# Altium PCB PCB_X_ring.PcbDoc
Units mm, origin at the board's own origin, x right, y up, seen from the top; angles counter-clockwise.
Board outline 60.71 x 60.71 mm, 2 copper layers (Top Layer, Bottom Layer); 29 components, 22 nets, 108 pads, 29 vias.
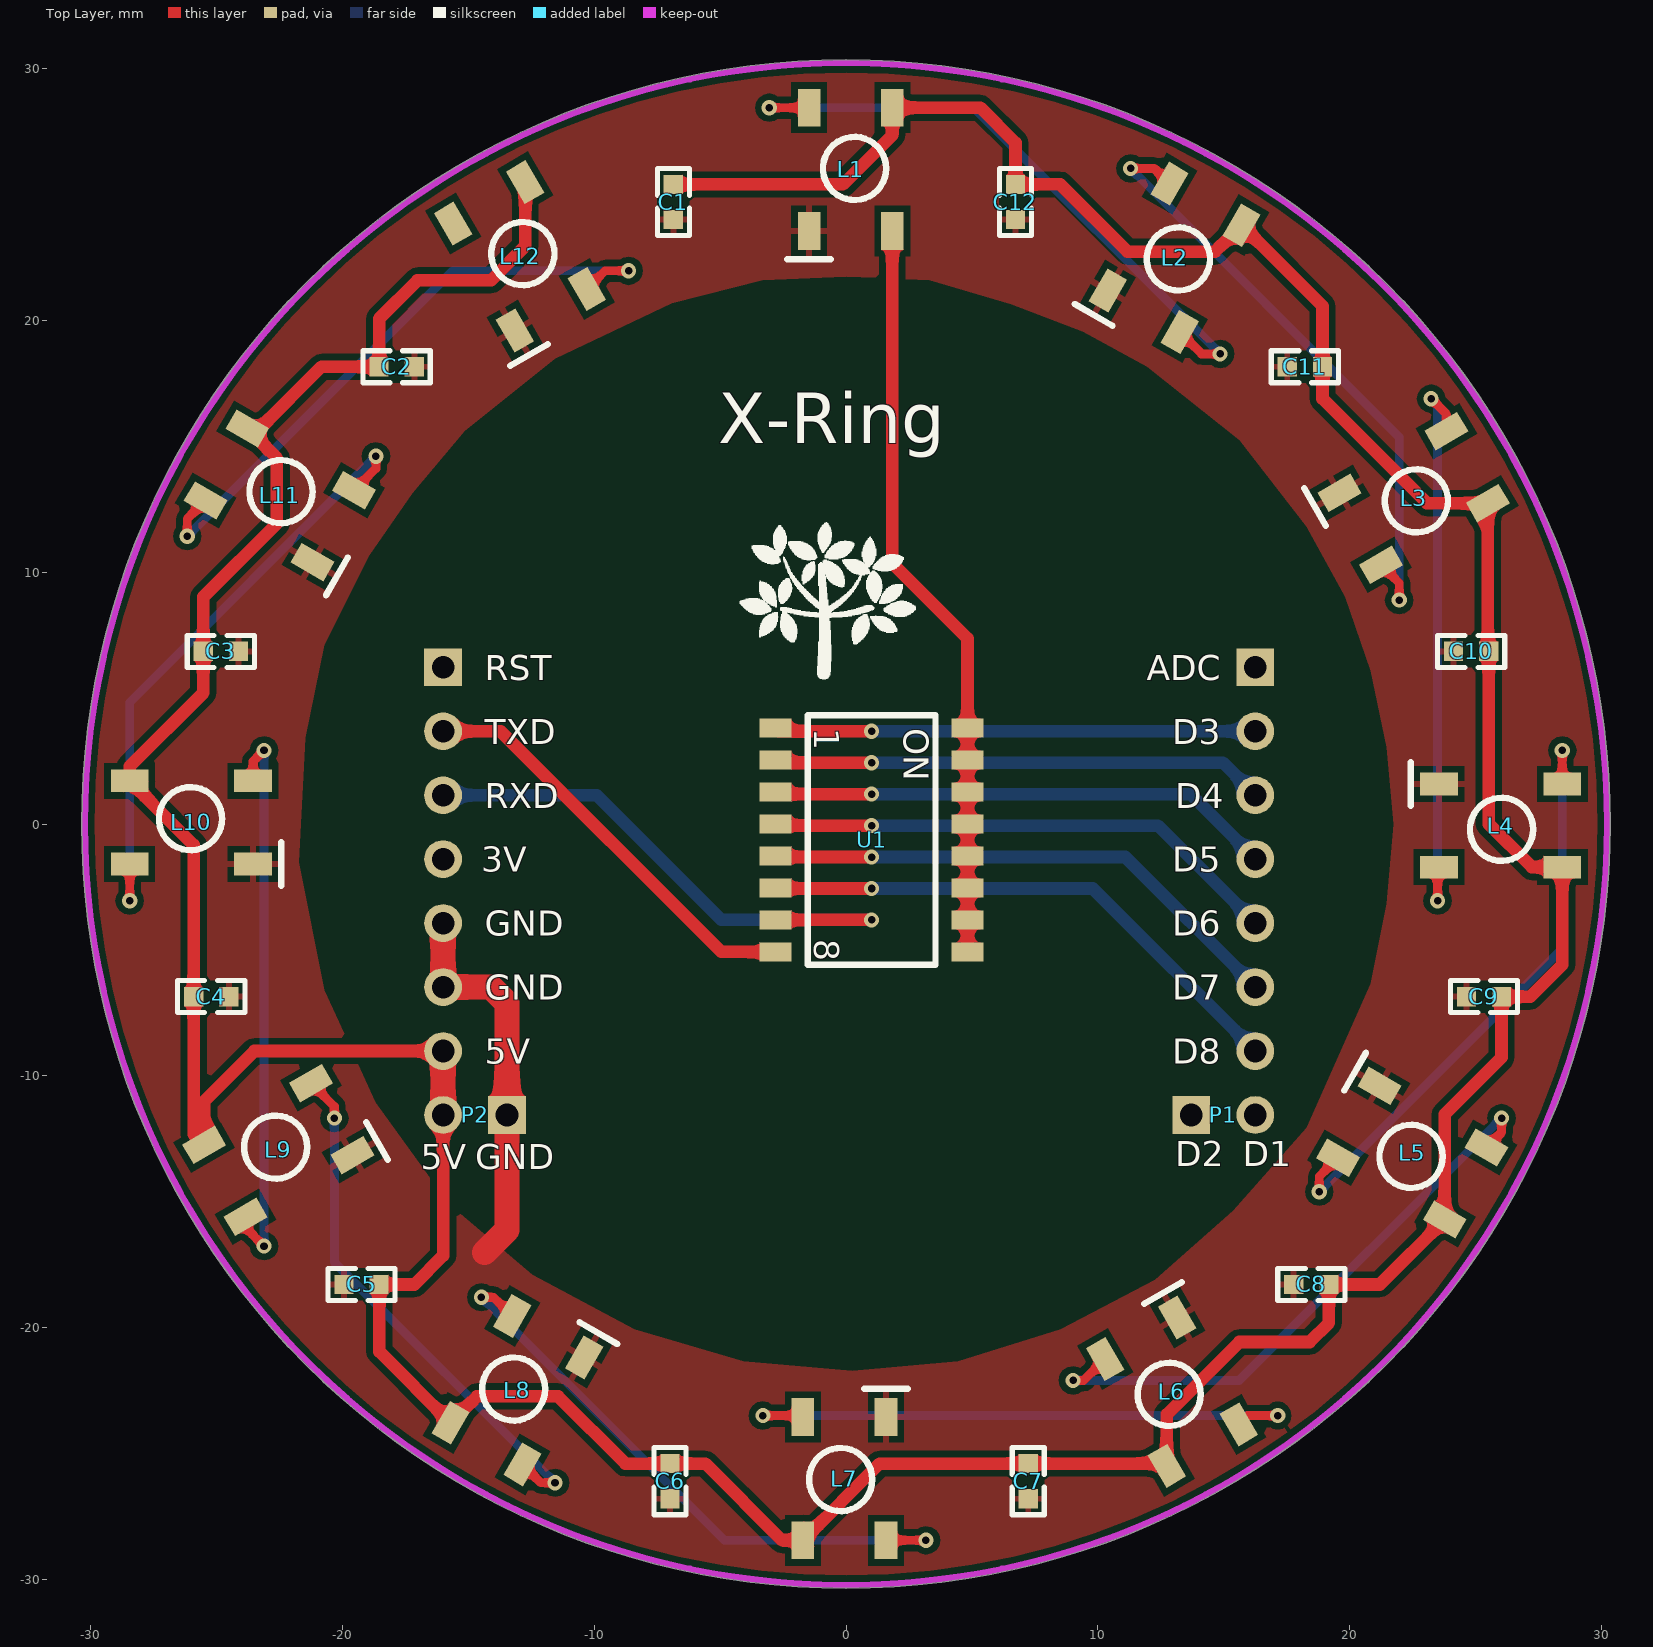
[diagram p0: Top Layer view]
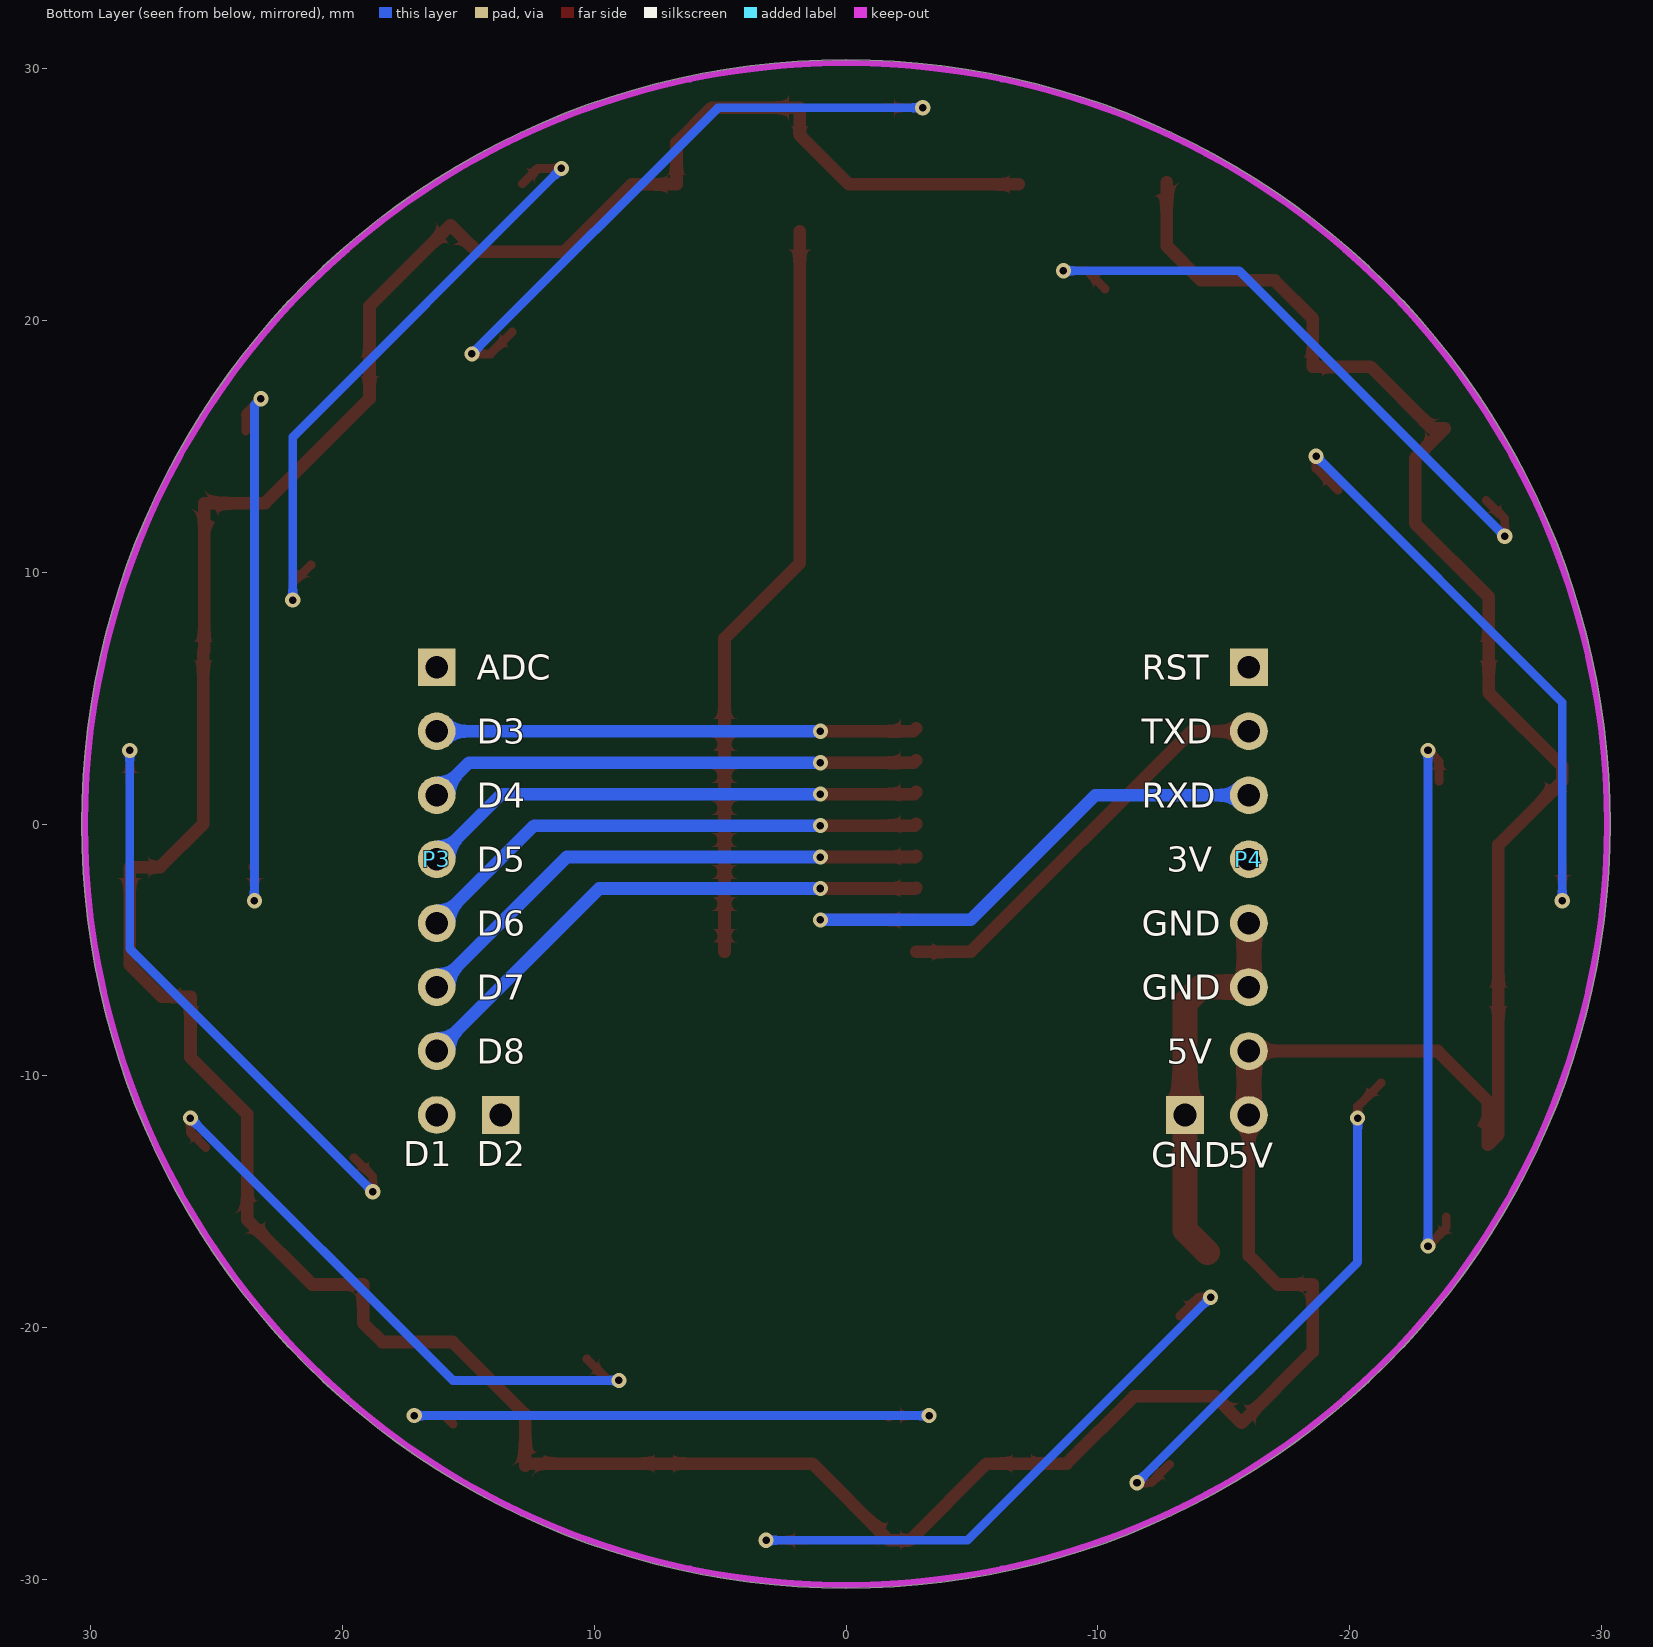
[diagram p1: Bottom Layer view, seen from below]

## Layer stack, top to bottom
Top Solder: solder mask 0.0102, Solder Resist, Dk 3.5
Top Layer: signal copper 0.0356
Dielectric 1: dielectric 0.32, FR-4, Dk 4.8
Bottom Layer: signal copper 0.0356
Bottom Solder: solder mask 0.0102, Solder Resist, Dk 3.5

## Board outline
-30.354,0 ccw(c0,0) 0,-30.354 ccw(c0,0) 30.354,0 ccw(c0,0) 0,30.354 ccw(c0,0)

## Design rules (kind name [scope] priority, off if disabled: settings)
Clearance [All] p1: gap=0.254
PolygonConnect PolygonConnect_via [IsVia] p1: connectstyle=Direct reliefconductorwidth=0.254 reliefentries=4 polygonreliefangle="90 Angle" airgapwidth=0.254
PolygonConnect [All] p2: connectstyle=Relief reliefconductorwidth=0.254 reliefentries=4 polygonreliefangle="90 Angle" airgapwidth=0.254
RoutingVias [All] p1: holewidth=0.711 width=1.27 viastyle="Through Hole" minholewidth=0.711 minwidth=1.27 maxholewidth=0.711 maxwidth=1.27
SolderMaskExpansion [All] p1: expansion=0.102
Width [All] p1: maxlimit=1 minlimit=0.254 preferedwidth=0.254
30 further rules are at their usual default settings.

## Components (designator, comment, footprint, x,y, rotation, side; value= is the part's Value field where it differs from the comment)
C1 "100nF" C0603 -7.036,25.425 r270 top
C2 "100nF" C0603 -18.567,17.983 r0 top
C3 "100nF" C0603 -25.552,6.68 r0 top
C4 "100nF" C0603 -25.933,-7.036 r0 top
C5 "100nF" C0603 -18.517,-18.11 r180 top
C6 "100nF" C0603 -7.163,-25.375 r270 top
C7 "100nF" C0603 7.061,-25.375 r270 top
C8 "100nF" C0603 19.202,-18.11 r180 top
C9 "100nF" C0603 26.06,-6.68 r180 top
C10 "100nF" C0603 25.552,7.036 r180 top
C11 "100nF" C0603 18.948,18.339 r180 top
C12 "100nF" C0603 6.553,25.425 r270 top
L1 "ws2812b" ws2812b 1.838,28.448 r270 top
L2 "ws2812b" ws2812b 15.706,23.781 r240 top
L3 "ws2812b" ws2812b 25.492,12.742 r210 top
L4 "ws2812b" ws2812b 28.448,-1.711 r180 top
L5 "ws2812b" ws2812b 23.781,-15.706 r150 top
L6 "ws2812b" ws2812b 12.742,-25.492 r120 top
L7 "ws2812b" ws2812b -1.711,-28.448 r90 top
L8 "ws2812b" ws2812b -15.706,-23.781 r60 top
L9 "ws2812b" ws2812b -25.492,-12.742 r30 top
L10 "ws2812b" ws2812b -28.448,1.711 r0 top
L11 "ws2812b" ws2812b -23.781,15.706 r330 top
L12 "ws2812b" ws2812b -12.742,25.492 r300 top
P1 "Header 2" HDR1X2 13.716,-11.557 r0 top
P2 "Header 2" HDR1X2 -13.462,-11.557 r180 top
P3 "Header 7" HDR1X7 16.256,6.223 r270 bottom
P4 "Header 7" HDR1X7 -16.002,6.223 r270 bottom
U1 "1.27mmSwitch" NumberSwitch -2.794,3.81 r270 top

## Footprints (in the part's own frame and the unit in brackets; to place one, negate y for a bottom-side part, rotate by r counter-clockwise, add the part's x,y. Pads: shape width x height; smd on the part's side, far side on the other; paste and mask are expansions set on the pad)
C0603 [mil]
  rect 30x30 smd: 1(1,7) 2(56,7)
  silkscreen extent -24,-18 81,32
HDR1X2 [mm] "Connector; Header; 2 Position"
  rect 1.5x1.5 hole 0.9: 1(0,0)
  round 1.5 hole 0.9: 2(2.54,0)
HDR1X7 [mm] "Connector; Header; 7 Position"
  rect 1.5x1.5 hole 0.9: 1(0,0)
  round 1.5 hole 0.9: 2(2.54,0) 3(5.08,0) 4(7.62,0) 5(10.16,0) 6(12.7,0) 7(15.24,0)
NumberSwitch [mm]
  rect 0.76x1.27 smd: 1(0,0) 2(1.27,0) 3(2.54,0) 4(3.81,0) 5(5.08,0) 6(6.35,0) 7(7.62,0) 8(8.89,0) 9(8.89,7.62) 10(7.62,7.62) 11(6.35,7.62) 12(5.08,7.62) 13(3.81,7.62) 14(2.54,7.62) 15(1.27,7.62) 16(0,7.62)
  silkscreen extent -0.51,1.27 9.4,6.35
ws2812b [mm]
  rect 1.5x0.9 smd: 1(0,0) 2(0,-3.3) 3(4.9,-3.3) 4(4.9,0)
  silkscreen extent 1.16,-4.17 6.02,-0.24

## Part data
C1 C2 C3 C4 C5 C6 C7 C8 C9 C10 C11 C12: library part C0603, "贴片电容"
L1 L2 L3 L4 L5 L6 L7 L8 L9 L10 L11 L12: "RGB灯珠"
P1 P2: "Header, 2-Pin"
P3 P4: "Header, 7-Pin"
U1: library part NumberSwitch, "拨码开关"

## Free pads (board coordinates)
  round 3 on Keep-Out: ""(-14.859,10.795) ""(15.113,10.795)

## Via types
v1: diameter 0.6, hole 0.3, Top Layer to Bottom Layer, tented both sides, 29 vias

## Nets (pads, with @x,y where several pads share a name; then routed paths per layer and width w, separated by ;. In a path a pad name is that pad's centre, name@x,y a point inside that pad or via, vN(x,y) a via of type N, cw(c..) or ccw(c..) an arc to the next point about the centre after c; other vN are vias at no path point)
CONNECT: L6.2 L7.4 | length 23.7
  Top Layer w0.35: v1(-3.302,-23.495) -1.764,-23.495 L7.4 ; L6.2 15.947,-23.495 v1(17.145,-23.495)
  Bottom Layer w0.35: v1(-3.302,-23.495) v1(17.145,-23.495)
DIN: L1.4 U1.9 U1.10 U1.11 U1.12 U1.13 U1.14 U1.15 U1.16 | length 29.9
  Top Layer w0.5: L1.4 1.838,10.354 4.826,7.366 U1.16 U1.15 U1.14 U1.13 U1.12 U1.11 U1.10 U1.9
GND: C1.2 C2.2 C3.2 C4.2 C5.2 C6.2 C7.2 C8.2 C9.2 C10.2 C11.2 C12.2 L1.3 L2.3 L3.3 L4.3 L5.3 L6.3 L7.3 L8.3 L9.3 L10.3 L11.3 L12.3 P2.1 P4.5 P4.6 | length 15.6
  Top Layer w1: P4.5 P4.6 -14.097,-6.477 -13.462,-7.112 P2.1 -13.462,-16.129 -14.351,-17.018
GPIO0: P3.2 U1.1 | length 19.3
  Top Layer w0.5: U1.1 -2.667,3.683 v1(1.016,3.683)
  Bottom Layer w0.5: v1(1.016,3.683) P3.2 P3.2@16.129,3.81
GPIO1: P4.2 U1.8 | length 16.8
  Top Layer w0.5: P4.2 -13.716,3.683 -4.953,-5.08 U1.8
GPIO2: P3.3 U1.2 | length 19.6
  Top Layer w0.5: U1.2 -2.688,2.434 v1(1.016,2.434)
  Bottom Layer w0.5: v1(1.016,2.434) 14.965,2.434 P3.3
GPIO3: P4.3 U1.7 | length 22.9
  Top Layer w0.5: U1.7 v1(1.016,-3.81)
  Bottom Layer w0.5: P4.3 -9.906,1.143 -4.953,-3.81 v1(1.016,-3.81)
GPIO12: P3.5 U1.4 | length 20.7
  Top Layer w0.5: U1.4 -2.73,-0.064 v1(1.016,-0.064)
  Bottom Layer w0.5: v1(1.016,-0.064) 12.383,-0.064 P3.5
GPIO13: P3.6 U1.5 | length 21.2
  Top Layer w0.5: U1.5 -2.752,-1.312 v1(1.016,-1.312)
  Bottom Layer w0.5: v1(1.016,-1.312) 11.091,-1.312 P3.6
GPIO14: P3.4 U1.3 | length 20.2
  Top Layer w0.5: U1.3 -2.709,1.185 v1(1.016,1.185)
  Bottom Layer w0.5: v1(1.016,1.185) 13.674,1.185 P3.4
GPIO15: P3.7 U1.6 | length 21.7
  Top Layer w0.5: U1.6 -2.773,-2.561 v1(1.016,-2.561)
  Bottom Layer w0.5: v1(1.016,-2.561) 9.8,-2.561 P3.7
NetL1_2: L1.2 L2.4 | length 25.5
  Top Layer w0.35: v1(-3.048,28.448) L1.2 ; L2.4 14.124,18.669 v1(14.859,18.669)
  Bottom Layer w0.35: v1(-3.048,28.448) 5.08,28.448 v1(14.859,18.669)
NetL2_2: L2.2 L3.4 | length 25.1
  Top Layer w0.35: v1(11.303,26.035) 12.244,26.035 L2.2 ; L3.4 21.971,9.57 v1(21.971,8.89)
  Bottom Layer w0.35: v1(11.303,26.035) 21.971,15.367 v1(21.971,8.89)
NetL3_2: L3.2 L4.4 | length 22.9
  Top Layer w0.35: v1(23.241,16.891) 23.842,16.29 L3.2 ; v1(23.495,-3.048) 23.495,-1.764 L4.4
  Bottom Layer w0.35: v1(23.241,16.891) 23.495,16.637 v1(23.495,-3.048)
NetL4_2: L4.2 L5.4 | length 24.5
  Top Layer w0.35: v1(18.796,-14.605) 18.796,-13.997 L5.4 ; L4.2 v1(28.448,2.921)
  Bottom Layer w0.35: v1(18.796,-14.605) 28.448,-4.953 v1(28.448,2.921)
NetL5_2: L5.2 L6.4 | length 24.4
  Top Layer w0.35: v1(9.017,-22.098) 9.443,-22.098 L6.4 ; L5.2 26.035,-12.244 v1(26.035,-11.684)
  Bottom Layer w0.35: v1(9.017,-22.098) 15.621,-22.098 v1(26.035,-11.684)
NetL7_2: L7.2 L8.4 | length 24.8
  Top Layer w0.35: v1(-14.478,-18.796) -13.997,-18.796 L8.4 ; L7.2 v1(3.175,-28.448)
  Bottom Layer w0.35: v1(-14.478,-18.796) -4.826,-28.448 v1(3.175,-28.448)
NetL8_2: L8.2 L9.4 | length 21.5
  Top Layer w0.35: L9.4 -20.32,-11.221 v1(-20.32,-11.684) ; L8.2 -12.117,-26.162 v1(-11.557,-26.162)
  Bottom Layer w0.35: v1(-20.32,-11.684) -20.32,-17.399 v1(-11.557,-26.162)
NetL9_2: L9.2 L10.4 | length 22.5
  Top Layer w0.35: L9.2 -23.842,-16.036 v1(-23.114,-16.764) ; L10.4 -23.548,2.487 v1(-23.114,2.921)
  Bottom Layer w0.35: v1(-23.114,-16.764) v1(-23.114,2.921)
NetL10_2: L10.2 L11.4 | length 24.9
  Top Layer w0.35: v1(-28.448,-3.048) L10.2 ; L11.4 -18.669,14.124 v1(-18.669,14.605)
  Bottom Layer w0.35: v1(-28.448,-3.048) -28.448,4.826 v1(-18.669,14.605)
NetL11_2: L11.2 L12.4 | length 25.6
  Top Layer w0.35: v1(-26.162,11.43) -26.162,12.117 L11.2 ; L12.4 -9.57,21.971 v1(-8.636,21.971)
  Bottom Layer w0.35: v1(-26.162,11.43) -15.621,21.971 v1(-8.636,21.971)
VCC_5V: C1.1 C2.1 C3.1 C4.1 C5.1 C6.1 C7.1 C8.1 C9.1 C10.1 C11.1 C12.1 L1.1 L2.1 L3.1 L4.1 L5.1 L6.1 L7.1 L8.1 L9.1 L10.1 L11.1 L12.1 P2.2 P4.7 | length 207.6
  Top Layer w0.5: P2.2 -16.002,-17.145 -17.145,-18.288 C5.1 -18.532,-18.298 -18.532,-20.955 L8.1 -14.658,-22.733 -11.43,-22.733 -8.763,-25.4 C6.1 -5.588,-25.4 -2.54,-28.448 L7.1 1.337,-25.4 C7.1 12.65,-25.4 L6.1 12.742,-23.453 15.621,-20.574 18.415,-20.574 19.177,-19.812 C8.1 21.199,-18.288 L5.1 23.781,-11.525 26.035,-9.271 C9.1 27.178,-6.858 28.448,-5.588 L4.1 27.238,-1.711 25.527,0 C10.1 ; P4.7 -23.495,-9.017 -25.492,-11.014 L9.1 -25.908,-12.326 C4.1 -25.908,-0.829 L10.1 -28.448,2.286 -25.527,5.207 C3.1 -25.527,9.017 -22.606,11.938 -22.606,14.531 L11.1 -23.283,15.706 -20.828,18.161 C2.1 -18.542,20.066 -17.018,21.59 -14.097,21.59 -12.742,22.945 L12.1 ; C1.1 -0.127,25.4 1.838,27.365 L1.1 5.334,28.448 6.731,27.051 C12.1 8.509,25.4 11.176,22.733 14.658,22.733 L2.1 18.923,20.564 C11.1 18.923,16.891 23.072,12.742 L3.1 C10.1@25.492,6.858
  Top Layer w1: P2.2 P4.7
pads on no net: L12.2 P1.1 P1.2 P3.1 P4.1 P4.4

## Polygon pours and split planes (outlines as drawn)
GND on Top Layer "Top Layer-No Net" (solid, remove dead copper, pour order 14): -41.021,32.512 54.737,32.512 55.372,31.877 41.529,18.034 41.529,-40.767 -25.019,-40.767 -29.591,-36.195

## Keep-outs
Keep-Out Layer:
  circle w0.254: c0,0 r30.226

## Other copper
Top Layer:
  pour cut-out: -21.463,3.429 -20.701,7.112 -18.923,10.668 -17.209,13.145 -15.113,15.621 -11.553,18.469 -6.896,20.691 -3.302,21.59 0,21.741 3.302,21.59 6.54,20.637 9.398,19.558 11.938,18.161 15.621,15.24 18.288,11.811 19.812,9.017 20.828,6.096 21.463,3.048 21.741,0 21.463,-3.175 20.828,-6.35 18.288,-12.065 15.367,-15.367 12.255,-18.098 8.509,-20.066 4.445,-21.336 0.254,-21.717 -4.064,-21.336 -8.382,-20.066 -12.446,-17.907 -15.748,-15.113 -18.669,-11.049 -20.701,-6.604 -21.717,-1.524
Bottom Layer:
  pour cut-out: -21.463,3.429 -20.701,7.112 -18.923,10.668 -17.209,13.145 -15.113,15.621 -11.553,18.469 -6.896,20.691 -3.302,21.59 0,21.741 3.302,21.59 6.54,20.637 9.398,19.558 11.938,18.161 15.621,15.24 18.288,11.811 19.812,9.017 20.828,6.096 21.463,3.048 21.741,0 21.463,-3.175 20.828,-6.35 18.288,-12.065 15.367,-15.367 12.255,-18.098 8.509,-20.066 4.445,-21.336 0.254,-21.717 -4.064,-21.336 -8.382,-20.066 -12.446,-17.907 -15.748,-15.113 -18.669,-11.049 -20.701,-6.604 -21.717,-1.524

## Silkscreen, mask and mechanical layers (free items; w line width, h text height)
Top Overlay:
  drawing of 1036 lines, arcs and shapes, not listed
  text "X-Ring" at -5.08,15.113 h2
  text "RST" at -14.351,5.715 h1
  text "ADC" at 11.938,5.715 h1
  text "TXD" at -14.351,3.175 h1
  text "D3" at 12.954,3.175 h1
  text "RXD" at -14.351,0.635 h1
  text "D4" at 13.081,0.635 h1
  text "3V" at -14.478,-1.905 h1
  text "D5" at 12.954,-1.905 h1
  text "GND" at -14.351,-4.445 h1
  text "D6" at 12.954,-4.445 h1
  text "GND" at -14.351,-6.985 h1
  text "D7" at 12.954,-6.985 h1
  text "5V" at -14.351,-9.525 h1
  text "D8" at 12.954,-9.525 h1
  text "D2" at 13.081,-13.589 h1
  text "D1" at 15.748,-13.589 h1
  text "5V" at -16.891,-13.716 h1
  text "GND" at -14.732,-13.716 h1
Bottom Overlay:
  text "RST" at -11.748,5.723 h1
  text "ADC" at 14.656,5.723 h1
  text "TXD" at -11.748,3.183 h1
  text "D3" at 14.656,3.183 h1
  text "RXD" at -11.748,0.643 h1
  text "D4" at 14.656,0.643 h1
  text "3V" at -12.748,-1.897 h1
  text "D5" at 14.656,-1.897 h1
  text "GND" at -11.748,-4.437 h1
  text "D6" at 14.656,-4.437 h1
  text "GND" at -11.748,-6.977 h1
  text "D7" at 14.656,-6.977 h1
  text "5V" at -12.748,-9.517 h1
  text "D8" at 14.656,-9.517 h1
  text "D2" at 14.656,-13.589 h1
  text "D1" at 17.577,-13.589 h1
  text "GND" at -12.129,-13.632 h1
  text "5V" at -15.169,-13.657 h1

## Text inside footprints (layer, text, board x,y; h text height)
U1: Top Overlay "8" at -1.27,-4.572 h1 r270; Top Overlay "1" at -1.27,3.81 h1 r270; Top Overlay "ON" at 2.286,3.81 h1 r270